# Altium PCB HeroRobot.PcbDoc
Units mil, origin at the board's own origin, x right, y up, seen from the top; angles counter-clockwise.
Board outline 3325 x 3450 mil, 2 copper layers (Top Layer, Bottom Layer); 127 components, 91 nets, 406 pads, 169 vias.
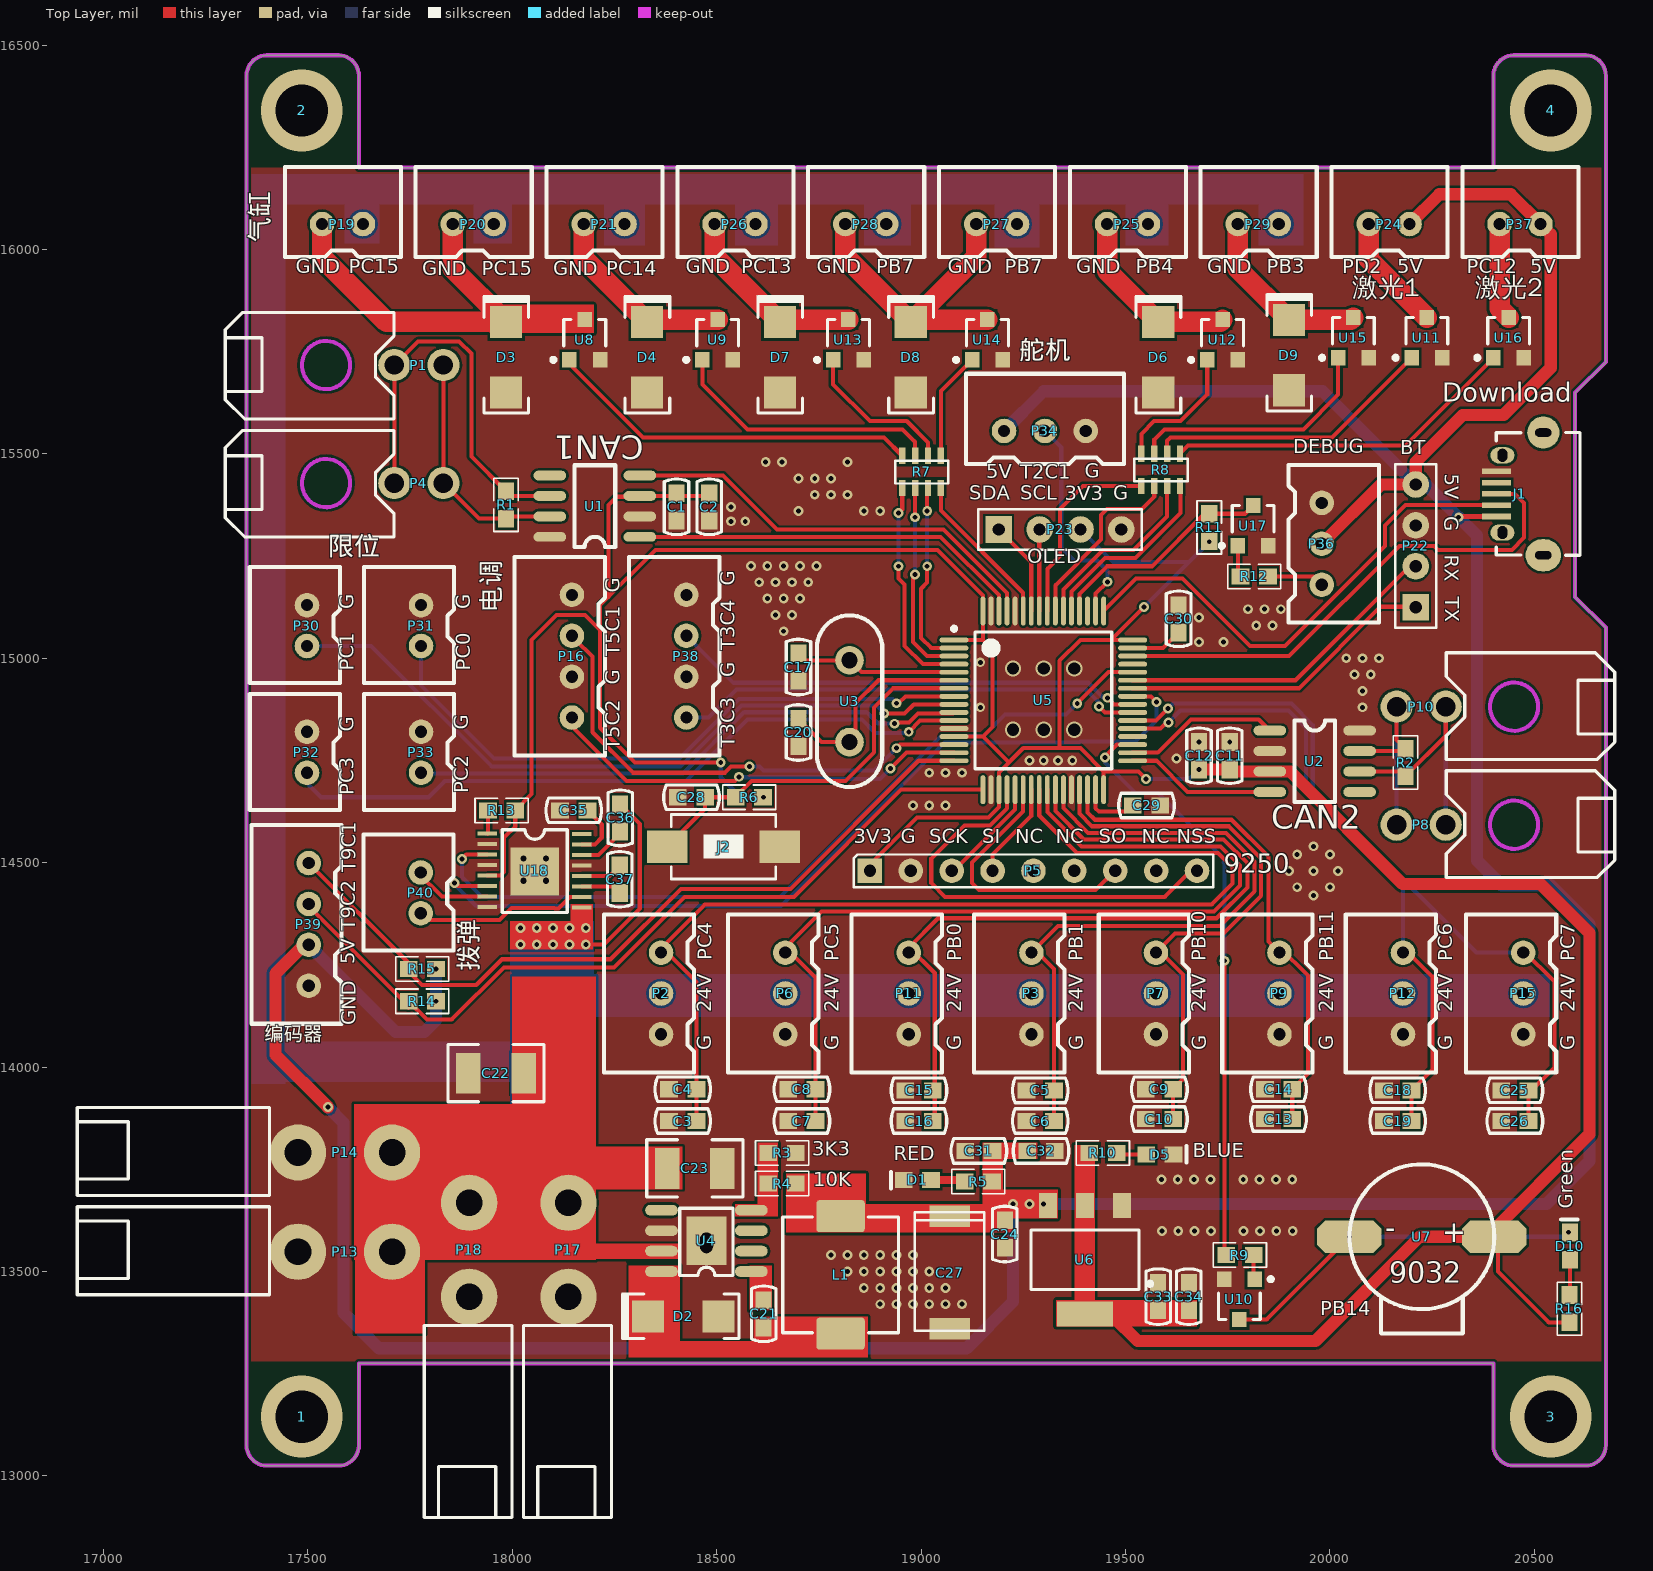
[diagram p0: Top Layer view]
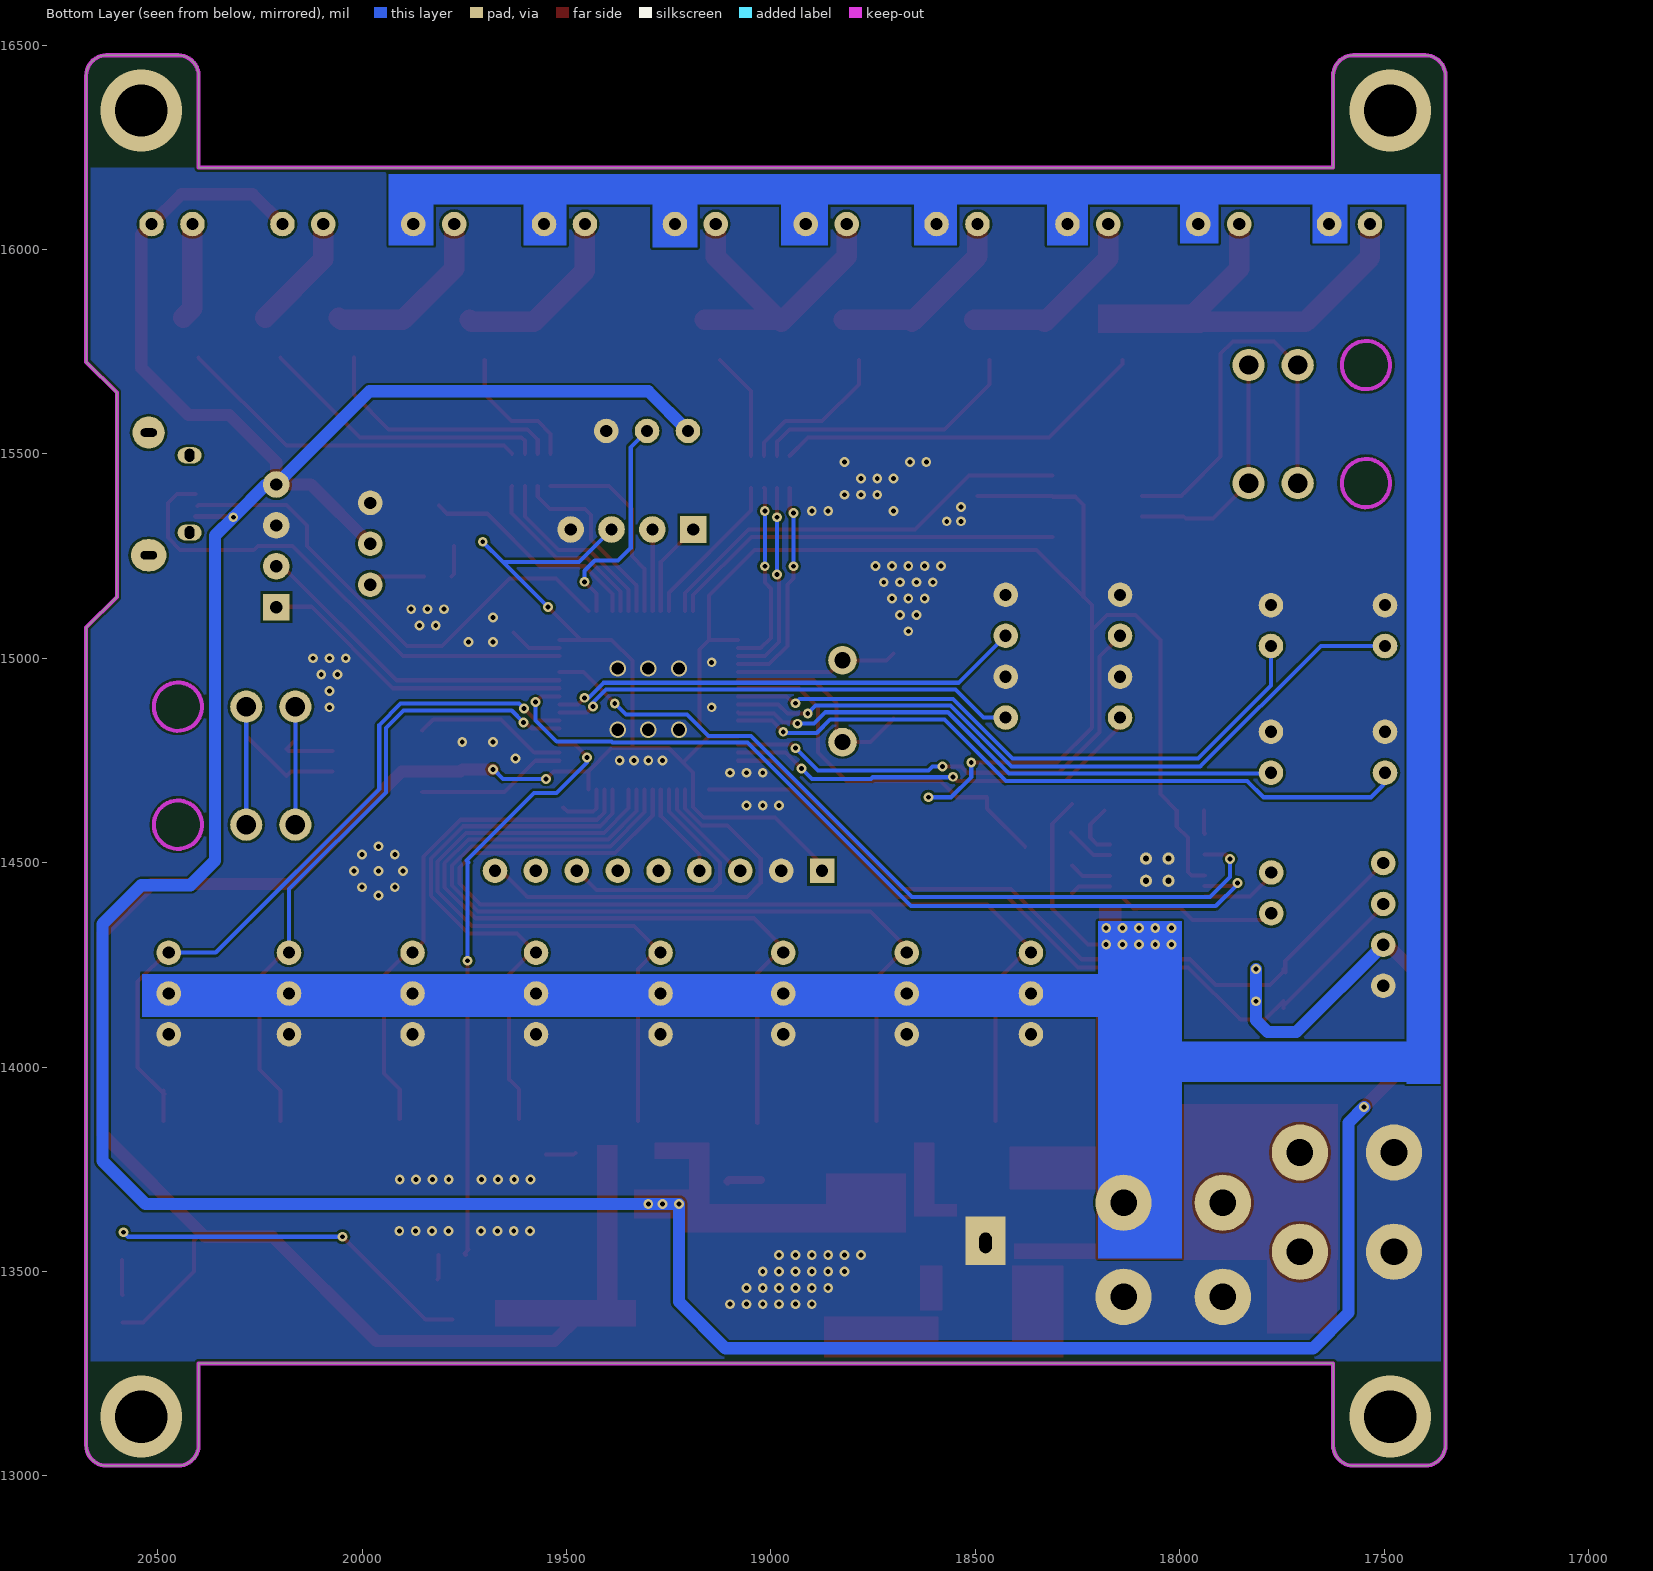
[diagram p1: Bottom Layer view, seen from below]

## Layer stack, top to bottom
Top Solder: solder mask 0.4, Solder Resist, Dk 3.5
Top Layer: signal copper 1.4
Dielectric 1: dielectric 12.6, FR-4, Dk 4.8
Bottom Layer: signal copper 1.4
Bottom Solder: solder mask 0.4, Solder Resist, Dk 3.5

## Board outline
17400,13025 17575,13025 ccw(c17575,13075) 17625,13075 17625,13275 20400,13275 20400,13075 ccw(c20450,13075) 20450,13025 20625,13025 ccw(c20625,13075) 20675,13075 20675,15075 20600,15150 20600,15650 20675,15725 20675,16425 ccw(c20625,16425) 20625,16475 20450,16475 ccw(c20450,16425) 20400,16425 20400,16200 17625,16200 17625,16425 ccw(c17575,16425) 17575,16475 17400,16475 ccw(c17400,16425) 17350,16425 17350,13075 ccw(c17400,13075)

## Design rules (kind name [scope] priority, off if disabled: settings)
Clearance [All] p1: gap=6
HoleSize [All] p1: absolutevalues=TRUE maxlimit=2333 minlimit=1 maxpercent=80.000 minpercent=20.000
HoleToHoleClearance [All] p1: gap=0 allowstackedmicrovias=TRUE
MinimumSolderMaskSliver [All] p1: minsoldermaskwidth=0
PolygonConnect [All] p1: connectstyle=Direct reliefconductorwidth=10 reliefentries=4 polygonreliefangle="90 Angle" airgapwidth=10
RoutingVias [All] p1: holewidth=28 width=50 viastyle="Through Hole" minholewidth=12 minwidth=24 maxholewidth=3333 maxwidth=2333
SilkToSilkClearance [All] p1: silktosilkclearance=0
SilkToSolderMaskClearance [IsPad] p1: minsilkscreentomaskgap=0 clearancetoexposedcopper=TRUE
SolderMaskExpansion [All] p1: expansion=4
Width [All] p1: maxlimit=2333 minlimit=10 preferedwidth=10
25 further rules are at their usual default settings.

## Components (designator, comment, footprint, x,y, rotation, side; value= is the part's Value field where it differs from the comment)
1 "Via_M3" Via_M3 17485,13145 r90 top
2 "Via_M3" Via_M3 17485,16340 r90 top
3 "Via_M3" Via_M3 20540,13145 r90 top
4 "Via_M3" Via_M3 20540,16340 r90 top
C1 "106" 0603C 18402,15372 r270 top
C2 "104" 0603C 18482,15372 r270 top
C3 "106" 0603C 18415.56,13868 r0 top
C4 "104" 0603C 18415.56,13945.85 r0 top
C5 "106" 0603C 19290.04,13943 r0 top
C6 "104" 0603C 19290.04,13868 r0 top
C7 "106" 0603C 18707.05,13868 r0 top
C8 "104" 0603C 18707.05,13945.85 r0 top
C9 "106" 0603C 19581.53,13945.85 r0 top
C10 "104" 0603C 19581.53,13873 r0 top
C11 "106" 0603C 19755,14760 r90 top
C12 "104" 0603C 19680,14760 r90 top
C13 "106" 0603C 19873.02,13873 r0 top
C14 "104" 0603C 19873.02,13945.85 r0 top
C15 "106" 0603C 18993.54,13943.02 r0 top
C16 "104" 0603C 18993.54,13868 r0 top
C17 "22p" 0603C 18700,14980 r270 top
C18 "106" 0603C 20164.51,13943.02 r0 top
C19 "104" 0603C 20164.51,13868 r0 top
C20 "22p" 0603C 18700,14820 r270 top
C21 "105" 0603C 18615,13395 r90 top
C22 "100uF" 1201C 17963,13985 r270 top
C23 "100uF" 1201C 18444,13752 r90 top
C24 "104" 0603C 19205,13590 r90 top
C25 "106" 0603C 20451,13943.02 r0 top
C26 "104" 0603C 20451,13868 r0 top
C27 "CAP_钽220" cap_钽E封装 19075,13495 r0 top
C28 "104" 0603C 18440,14660 r180 top
C29 "2.2u" 0603C 19550,14640 r0 top
C30 "2.2u" 0603C 19630,15095 r90 top
C31 "106" 0603C 19140,13795 r0 top
C32 "104" 0603C 19295,13795 r180 top
C33 "106" 0603C 19580,13440 r270 top
C34 "104" 0603C 19655,13440 r270 top
C35 "104" 0603C 18152,14628 r180 top
C36 "104" 0603C 18264,14608 r90 top
C37 "104" 0603C 18263,14461 r270 top
D1 "LED" LED_0603 18990,13725 r180 top
D2 "Diode_SS34" Diode_SS34 18420,13390 r180 top
D3 "Diode_SS34" Diode_SS34 17985,15735 r90 top
D4 "Diode_SS34" Diode_SS34 18330,15735 r90 top
D5 "LED" LED_0603 19585,13785 r0 top
D6 "Diode_SS34" Diode_SS34 19580,15735 r90 top
D7 "Diode_SS34" Diode_SS34 18655,15735 r90 top
D8 "Diode_SS34" Diode_SS34 18975,15735 r90 top
D9 "Diode_SS34" Diode_SS34 19900,15740 r90 top
D10 "LED" LED_0603 20588,13563 r90 top
J1 "USB_MICRO" USB_MICRO 20465,15402 r90 top
J2 "KEY" KEY 18520,14540 r90 top
L1 "15uH" Inductor7.2X7.2 18805,13485 r90 top
P1 "Header_CAN" Header2_3002 17560.17,15713.19 r270 top
P2 "Header3" Header3_white 18334,14180 r90 top
P3 "Header3" Header3_white 19240,14180 r90 top
P4 "Header_CAN" Header2_3002 17560.17,15424.49 r270 top
P5 "Header9" Header9 19275,14480 r90 top
P6 "Header3" Header3_white 18638,14180 r90 top
P7 "Header3" Header3_white 19544.57,14180 r90 top
P8 "Header_CAN" Header2_3002 20434.83,14596.81 r90 top
P9 "Header3" Header3_white 19846.71,14180 r90 top
P10 "Header_CAN" Header2_3002 20434.83,14885.51 r90 top
P11 "Header3" Header3_white 18940,14180 r90 top
P12 "Header3" Header3_white 20148.86,14180 r90 top
P13 "Header2X1" Header_POWER 17341,13543.19 r270 top
P14 "Header2X1" Header_POWER 17341,13786.06 r270 top
P15 "Header3" Header3_white 20443,14180 r90 top
P16 "Header4" Header4_white 18115,15005 r90 top
P17 "Header2X1" Header_POWER 18142.56,13303 r0 top
P18 "Header2X1" Header_POWER 17899.69,13303 r0 top
P19 "Header" Header2_white 17589.76,16089.13 r0 top
P20 "Header" Header2_white 17909.78,16089.13 r0 top
P21 "Header" Header2_white 18229.81,16089.13 r0 top
P22 "Header4" Header4 20210,15325 r180 top
P23 "Header4" Header4 19390,15315 r90 top
P24 "Header" Header2_white 20149.97,16089.13 r0 top
P25 "Header" Header2_white 19509.92,16089.13 r0 top
P26 "Header" Header2_white 18549.84,16089.13 r0 top
P27 "Header" Header2_white 19189.89,16089.13 r0 top
P28 "Header" Header2_white 18869.86,16089.13 r0 top
P29 "Header" Header2_white 19829.95,16089.13 r0 top
P30 "Header" Header2_white 17471,15085 r90 top
P31 "Header" Header2_white 17750,15085 r90 top
P32 "Header" Header2_white 17471,14775 r90 top
P33 "Header" Header2_white 17750,14775 r90 top
P34 "Header3" Header3_white 19303,15586 r0 top
P36 "Header3" Header3_white 20010,15280 r270 top
P37 "Header" Header2_white 20470,16089.13 r0 top
P38 "Header4" Header4_white 18395,15005 r90 top
P39 "Header4" Header4_white 17471,14349 r90 top
P40 "Header" Header2_white 17749,14431 r90 top
R1 "1K" 0603R 17985,15375 r90 top
R2 "1K" 0603R 20185,14745 r270 top
R3 "3k3" 0603R 18660,13790 r0 top
R4 "10k" 0603R 18660,13715 r180 top
R5 "1K" 0603R 19140,13720 r0 top
R6 "1K" 0603R 18580,14660 r0 top
R7 "1K" 8P4R_0603 19000,15455 r0 top
R8 "1K" 8P4R_0603 19585,15460 r0 top
R9 "1K" 0603R 19780,13540 r180 top
R10 "1K" 0603R 19445,13790 r180 top
R11 "1K" 0603R 19705,15320 r270 top
R12 "1K" 0603R 19815,15200 r0 top
R13 "10k" 0603R 17974,14628 r0 top
R14 "10K" 0603R 17780,14161 r0 top
R15 "10K" 0603R 17780,14240 r0 top
R16 "1K" 0603R 20586,13409 r90 top
U1 "VD230" SO_8 18205,15380 r180 top
U2 "VD230" SO_8 19960,14740 r0 top
U3 "XTAL" XATL_8M 18810,14905 r270 top
U4 "TPS5430/5450" TPS5430 18465,13565 r180 top
U5 "STM32F405RGT6(F103RCT6)" "LQFP_64Pins - duplicate" 19300,14900 r0 top
U6 "1117" SOT-223 19400,13520 r180 top
U7 "Bell" BELL_无源 20220,13590 r0 top
U8 "BJT-2N5551" SOT_23 18175,15755 r0 top
U9 "BJT-2N5551" SOT_23 18500,15755 r0 top
U10 "BJT-2N5551" SOT_23 19780.98,13456.13 r180 top
U11 "BJT-2N5551" SOT_23 20235,15760 r0 top
U12 "BJT-2N5551" SOT_23 19735,15755 r0 top
U13 "BJT-2N5551" SOT_23 18820,15755 r0 top
U14 "BJT-2N5551" SOT_23 19160,15755 r0 top
U15 "BJT-2N5551" SOT_23 20055,15760 r0 top
U16 "BJT-2N5551" SOT_23 20435,15760 r0 top
U17 "BJT-2N5551" SOT_23 19810,15300 r0 top
U18 "DRV8800" HTSSOP 18054,14482 r0 top

## Footprints (in the part's own frame and the unit in brackets; to place one, negate y for a bottom-side part, rotate by r counter-clockwise, add the part's x,y. Pads: shape width x height; smd on the part's side, far side on the other; paste and mask are expansions set on the pad)
8P4R_0603 [mm]
  rect 0.4x1 smd: 1(-1.169,-0.976) 2(-0.369,-0.976) 3(0.431,-0.976) 4(1.231,-0.976) 5(1.231,1.024) 6(0.431,1.024) 7(-0.369,1.024) 8(-1.169,1.024)
  silkscreen extent -1.6,-0.7 1.7,0.7, body extent -1.6,-1 1.7,1, height 0.7
0603C [mm]
  rect 1.1x1 smd: 1(-0.811,0) 2(0.889,0)
  silkscreen extent -1.69,-0.76 1.77,0.76, body extent -1.29,-0.47 1.31,0.53, height 0.89
0603R [mm]
  rect 1.1x1 smd: 1(-0.85,0) 2(0.85,0)
  silkscreen extent -1.65,-0.76 1.65,0.76, body extent -0.8,-0.4 0.8,0.4, height 0.45
1201C [mil]
  rect 100x60 smd: 1(0,64.72) 2(0,-70.28)
  silkscreen extent -70,-120 70,115, body extent -65,-115 65,110, height 100
BELL_无源 [mm]
  oct 4x2 smd: 1(4.627,-0.127) 2(-4.373,-0.127)
  silkscreen extent -4.37,-6.13 4.63,4.37
cap_钽E封装 [mil]
  rect 98.43x53.54 smd: 1(-5,-135) 2(-5,140)
  silkscreen extent -90,-140 80,150, body extent -90,-165 80,170, height 161
Diode_SS34 [mm]
  rect 2x2 smd: 1(-2.15,0) 2(2.225,0)
  silkscreen extent -3.43,-1.4 3.81,1.38, body extent -2.4,-1.4 2.45,1.38, height 1.4
Header2_3002 [mm]
  round 2 hole 1.2: 1(-0.1,6.895) 2(-0.1,3.845)
  Keep-Out Layer circle w0.254: c-0.1,-0.398 r1.5
  silkscreen extent -3.38,-6.66 3.25,3.82, body extent -3.3,-6.73 3.18,7.28, height 7.11
Header2_white [mil]
  round 60 hole 30: 1(-55,-27) 2(45,-27)
  silkscreen extent -146,-108 138,113
Header3_white [mil]
  round 60 hole 30: 1(-100,-30) 2(0,-30) 3(100,-30)
  silkscreen extent -193,-111 193,110
Header4 [mil]
  rect 65x65 hole 30: 1(0,200)
  round 65 hole 30: 2(0,100) 3(0,0) 4(0,-100)
  silkscreen extent -50,-150 50,250, body extent -50,-150 50,250, height 250
Header4_white [mil]
  round 60 hole 30: 1(-150,-31) 2(-50,-31) 3(50,-31) 4(150,-31)
  silkscreen extent -243,-112 243,109
Header9 [mil]
  rect 60x60 hole 30: 1(0,400)
  round 60 hole 30: 2(0,300) 3(0,200) 4(0,100) 5(0,0) 6(0,-100) 7(0,-200) 8(0,-300) 9(0,-400)
  silkscreen extent -40,-440 40,440
Header_POWER [mm]
  round 3.5 hole 1.65: 1(-0.127,9.271) 2(-0.127,3.429)
  silkscreen extent -2.92,-10.29 2.54,1.65, body extent -2.92,-10.54 2.54,10.03, height 11.43
HTSSOP [mm]
  round 0.762 hole 0.381: 0(-0.672,0.706) 0(-0.672,-0.669) 0(0.728,-0.669) 0(0.728,0.706)
  rect 3x3 smd: 0(0.028,-0.094)
  rect 1.2x0.25 smd: 1(-2.922,2.256) 2(-2.922,1.606) 3(-2.922,0.956) 4(-2.922,0.306) 5(-2.922,-0.344) 6(-2.922,-0.994) 7(-2.922,-1.644) 8(-2.922,-2.294) 9(2.953,-2.319) 10(2.953,-1.669) 11(2.953,-1.019) 12(2.953,-0.369) 13(2.953,0.281) 14(2.953,0.931) 15(2.953,1.581) 16(2.953,2.231)
  silkscreen extent -2,-2.64 2.05,2.51, body extent -2.01,-2.67 2.06,2.51, height 0.76
Inductor7.2X7.2 [mm]
  rrect20% 2x3 smd: 1(-3.479,0.044) 2(3.821,0.044)
  silkscreen extent -3.43,-3.56 3.77,3.64, body extent -3.4,-3.56 3.76,3.63, height 4
KEY [mm]
  rect 2x2.5 smd: 1(-0.025,3.581) 2(-0.025,-3.419)
  silkscreen extent -2.03,-3.17 1.97,3.33, body extent -2.06,-3.15 2.01,3.33, height 1.2
LED_0603 [mm]
  rect 1.1x1 smd: 1(-0.875,0.025) 2(0.825,0.025)
  silkscreen extent 1.63,-0.46 1.63,0.56, body extent -1.52,-0.51 1.4,0.64, height 0.66
"LQFP_64Pins - duplicate" [mm]
  oval 1.8x0.3 smd: 1(-5.575,3.674) 2(-5.575,3.174) 3(-5.575,2.674) 4(-5.575,2.174) 5(-5.575,1.674) 6(-5.575,1.174) 7(-5.575,0.674) 8(-5.575,0.174) 9(-5.575,-0.326) 10(-5.575,-0.826) 11(-5.575,-1.326) 12(-5.575,-1.826) 13(-5.575,-2.326) 14(-5.575,-2.826) 15(-5.575,-3.326) 16(-5.575,-3.826) 33(5.525,-3.826) 34(5.525,-3.326) 35(5.525,-2.826) 36(5.525,-2.326) 37(5.525,-1.826) 38(5.525,-1.326) 39(5.525,-0.826) 40(5.525,-0.326) 41(5.525,0.174) 42(5.525,0.674) 43(5.525,1.174) 44(5.525,1.674) 45(5.525,2.174) 46(5.525,2.674) 47(5.525,3.174) 48(5.525,3.674)
  oval 0.3x1.8 smd: 17(-3.775,-5.626) 18(-3.275,-5.626) 19(-2.775,-5.626) 20(-2.275,-5.626) 21(-1.775,-5.626) 22(-1.275,-5.626) 23(-0.775,-5.626) 24(-0.275,-5.626) 25(0.225,-5.626) 26(0.725,-5.626) 27(1.225,-5.626) 28(1.725,-5.626) 29(2.225,-5.626) 30(2.725,-5.626) 31(3.225,-5.626) 32(3.725,-5.626) 49(3.725,5.474) 50(3.225,5.474) 51(2.725,5.474) 52(2.225,5.474) 53(1.725,5.474) 54(1.225,5.474) 55(0.725,5.474) 56(0.225,5.474) 57(-0.275,5.474) 58(-0.775,5.474) 59(-1.275,5.474) 60(-1.775,5.474) 61(-2.275,5.474) 62(-2.775,5.474) 63(-3.275,5.474) 64(-3.775,5.474)
  silkscreen extent -5.7,-4.33 4.22,4.5, body extent -5.03,-5.08 4.97,4.92, height 1.6
SO_8 [mil]
  oval 80x24 smd: 1(-107,83) 2(-107,33) 3(-107,-17) 4(-107,-67) 5(113,-67) 6(113,-17) 7(113,33) 8(113,83)
  silkscreen extent -47,-92 53,108, body extent -91,-97 102,113, height 30
SOT-223 [mm]
  rect 1.1x1.55 smd: 1(-2.325,-3.604) 2(-0.025,-3.604) 3(2.275,-3.604)
  rect 3.45x1.55 smd: 2(-0.025,3.146)
  silkscreen extent -4.19,-2.08 3.32,1.62, body extent -3.33,-4.17 3.28,3.2, height 0.8
SOT_23 [mm]
  rect 0.9x0.95 smd: 1(-0.889,-0.635) 2(1.011,-0.635) 3(0.061,1.865)
  silkscreen extent -2.01,-0.76 1.36,1.87, body extent -1.27,-0.25 1.4,1.52, height 0.89
TPS5430 [mil]
  oval 80x26 smd: 1(-120,65) 2(-120,15) 3(-120,-35) 4(-120,-85) 5(100,-85) 6(100,-35) 7(100,15) 8(100,65)
  oval 50x70 hole 30 slot 50 at 90 deg: 6(-10,-5)
  rect 98x118 smd: 6(-10,-10)
  rect 98x118 smd far side: 6(-10,-10)
  silkscreen extent -75,-90 55,75, body extent -80,-100 60,80, height 30
USB_MICRO [mm]
  rect 0.35x1.8 smd: 1(-1.4,1.45) 2(-0.7,1.45) 3(0,1.45) 4(0.7,1.45) 5(1.4,1.45)
  oval 2x2.2 hole 0.508 slot 1.016 at 90 deg unplated: 6(-3.81,-1.45)
  oval 1x1.5 hole 0.6 slot 0.8 at 0 deg: 6(-2.4,1.09) 6(2.4,1.09)
  round 2 hole 0.508 slot 1.016 at 90 deg unplated: 6(3.81,-1.45)
  silkscreen extent -3.81,-3.74 3.81,1.47
Via_M3 [mil]
XATL_8M [mil]
  round 70 hole 40: 1(-90,15) 2(110,15)
  silkscreen extent -200,-65 220,95, body extent -200,-65 220,95, height 110

## Part data
C1 C3 C5 C7 C9 C11 C13 C15 C18 C21 C25 C31 C33: library part C_106, "0603/0805"
C2 C4 C6 C8 C10 C12 C14 C16 C17 C19 C20 C24 C26 C28 C29 C30 C32 C34 C35 C36 C37: library part C_104, "0603/0805"
C22 C23: library part CAP100uF
C27: "CAP"
D2 D3 D4 D6 D7 D8 D9: "肖特基二极管"
L1: library part Inductor, "屏蔽电感"
P13 P14 P17 P18: "power"
P19 P20 P21 P24 P25 P26 P27 P28 P29 P30 P31 P32 P33 P37 P40: library part Header2
R1 R2 R3 R4 R5 R6 R9 R10 R11 R12 R13 R14 R15 R16: library part R, "0603/0805"
R7 R8: library part R_8P4R
U1 U2: "SO-8"
U4: "降压"
U5: "64PINS"
U6: library part AMS1117-3.3
U18: "HTSSOP"

## Via types
v1: diameter 24, hole 12, Top Layer to Bottom Layer, tented both sides, 159 vias
v2: diameter 40, hole 30, Top Layer to Bottom Layer, tented both sides, 6 vias
v3: diameter 200, hole 128, Top Layer to Bottom Layer, 4 vias

## Nets (pads, with @x,y where several pads share a name; then routed paths per layer and width w, separated by ;. In a path a pad name is that pad's centre, name@x,y a point inside that pad or via, vN(x,y) a via of type N, cw(c..) or ccw(c..) an arc to the next point about the centre after c; other vN are vias at no path point)
1: D3.2 P19.1 P20.1 U8.3 | length 890.9
  Top Layer w50: P19.1 17534.76,15980.24 17692.4,15822.6 D3.2 17854.78,15952.82 P20.1
2: D4.2 P21.1 U9.3 | length 478.6
  Top Layer w50: P21.1 18174.81,15977.79 D4.2 18335.83,15828.43 U9.3
3: D7.2 P26.1 U13.3 | length 475.7
  Top Layer w50: P26.1 18494.84,15982.76 D7.2 18660.83,15828.43 U13.3
3V3: C1.1 C2.1 C11.1 C12.1 C33.2 C34.2 P5.1 P23.3 R6.2 R10.2 R11.2 R13.2 R16.1 U1.3 U2.3 U5.1 U5.13 U5.19 U5.32 U5.48 U5.64 U6.2 U7.1 U18.5 | length 9411.6
  Top Layer w10: U18.5 17971.45,14468.45 17980,14477 17980,14561 18007.46,14588.46 R13.2 18047,14667.54 18047,15045 18108,15106 18178,15106 18215,15069 ; 18235,15150 18235,15375 18255,15395 18310,15395 U1.3 18414.93,15397 18415,15396.93 C2.1@18495,15396.93 ; v1(18510,14745) 18300,14745 18215,14830 18215,15069 ; P5.1@18875,14495 18990,14610 19164.75,14610 19190.73,14635.99 U5.19 19190.73,14720.73 19250,14780 19335,14780 ; U5.13 19151.14,14808.42 19175,14832.28 19175,15021 19151.36,15044.64 ; U5.1 19151.36,15044.64 ; 19151.36,14808.64 19215,14745 ; U6.2@19401,13396.13 19463.87,13396.13 19471,13389 ; U6.2@19401,13661.87 19401,13779.46 R10.2 ; U5.32 19446.64,14723.36 ; U5.48 19464.64,15044.64 ; v1(19545,15125) 19464.64,15044.64 ; v1(19550,14705) 19531.64,14723.36 19446.64,14723.36 ; U7.1 20411,13576.17 20411,13500 20535.46,13375.54 R16.1 ; 18215,15069 18215,15130 18350,15265 19040,15265 19151.36,15153.64 U5.64 19151.36,15044.64 ; 19335,14780 19390,14780 19446.64,14723.36 ; 19335,14780 19339,14784 19339,14994 19389.64,15044.64 19464.64,15044.64
  Top Layer w30: 19471,13389 19530,13330 19965,13330 20220,13585 20384,13585 20635,13836 20635,14328 20515,14448 20178,14448 19903,14723 U2.3 19760.07,14723 C11.1 v1(19680,14728.07)
  Bottom Layer w10: v1(18510,14745) 18510,14710 18560,14660 v1(18615,14660) ; P23.3 19470,15235 19655,15235 ; v1(19545,15125) 19655,15235 ; v1(19550,14705) 19655,14705 19678.07,14728.07 v1(19680,14728.07) ; v1(19705,15285) 19655,15235
4: D8.2 P27.1 P28.1 U14.3 | length 793.2
  Top Layer w50: P28.1 18814.86,15982.73 D8.2 D8.2@18980.83,15828.43 ; P27.1 19134.89,15982.49 D8.2@18980.83,15828.43 ; U14.3 D8.2@18980.83,15828.43
5: D6.2 P25.1 U12.3 | length 451.2
  Top Layer w50: P25.1 19454.92,15947.68 D6.2 19731.57,15822.6 U12.3
5V: C24.2 C27.2 C31.2 C32.2 J1.1 L1.2 P22.4 P24.2 P34.1 P36.2 P37.2 P39.2 R4.1 R5.2 R14.2 R15.2 U6.3 | length 9639.6
  Top Layer w12: v1(20315,15345) 20316.88,15346.88 J1.1
  Top Layer w30: P39.2 17502,14310 17421,14229 17421,14030 v1(17549,13902) ; P36.2 20125,15425 P22.4 20210,15480 20325,15595 20425,15595 20540,15710 20540,16037.13 P37.2 20442.13,16135 20267.85,16135 P24.2
  Bottom Layer w30: P39.2 17715,14086 17785,14086 17813.46,14114.46 v1(17813.46,14161) v1(17813.46,14240) ; v1(17549,13902) 17587,13864 17587,13399 17674,13312 19111,13312 19225,13426 v1(19225,13665) v1(19265,13665) v1(19300,13665) 20530,13665 20635,13770 20635,14350 20540,14445 20420,14445 20360,14505 20360,15300 v1(20315,15345) 20235,15425 P22.4 19982,15653 19300,15653 P34.1
6: D9.2 P29.1 U15.3 | length 446.1
  Top Layer w50: P29.1 19774.95,15952.65 D9.2 20051.57,15827.6 U15.3
24V: C22.1 C23.1 C36.2 P2.2 P3.2 P6.2 P7.2 P9.2 P11.2 P12.2 P13.1 P14.1 P15.2 P17.1 P18.1 P19.2 P20.2 P21.2 P25.2 P26.2 P27.2 P28.2 P29.2 U4.7 U18.9 | length 443.3
  Top Layer w10: v1(18180,14300) 18224,14300 18312,14388 18312,14595 C36.2
  other v1: 18020,14300 18060,14300 18100,14300 18140,14300 18020,14340 18060,14340 18100,14340 18140,14340 18180,14340
BEEP: R9.2 U5.35 | length 1463.1
  Top Layer w10: v1(19450,14757.5) 19450,14760 19478.73,14788.73 U5.35 ; v1(19742,14260) 19742,13555.46 19740,13553.46 19750,13543.46 R9.2
  Bottom Layer w10: v1(19450,14757.5) 19450,14745 19525,14670 19580,14670 19745,14505 19740,14500 19742,14498 v1(19742,14260)
CAN1_RX: U1.4 U5.61 | length 1061.5
  Top Layer w10: U1.4 18515.68,15447 18648,15314.68 19055.32,15314.68 19210.42,15159.58 U5.61
CAN1_TX: U1.1 U5.62 | length 976.6
  Top Layer w10: U1.1 18522,15297 19048,15297 19190.73,15154.27 U5.62
CAN1H: P1.1 P4.1 R1.1 U1.7 | length 587.3
  Top Layer w10: P1.1 P4.1 17918.52,15341.54 R1.1 17990.46,15347 U1.7
CAN1L: P1.2 P4.2 R1.2 U1.6 | length 997
  Top Layer w10: P4.2 P1.2 17769.43,15775 17870,15775 17900,15745 17900,15493.46 R1.2 17996.46,15397 U1.6
CAN2_RX: U2.4 U5.33 | length 367.1
  Top Layer w10: U5.33 19575.64,14749.36 19652,14673 U2.4
CAN2_TX: U2.1 U5.34 | length 380.2
  Top Layer w10: U5.34 19579.05,14769.05 19660,14850 19826,14850 U2.1
CAN2H: P8.1 P10.1 R2.1 U2.7 | length 515
  Top Layer w10: U2.7 20179.54,14773 R2.1 20163.37,14800.09 P10.1
  Bottom Layer w10: P8.1 P10.1
CAN2L: P8.2 P10.2 R2.2 U2.6 | length 616.3
  Top Layer w10: U2.6 20173.54,14723 R2.2 20283.45,14809.98 P10.2
  Bottom Layer w10: P8.2 P10.2
CLK: J1.2 U5.49 | length 1230.8
  Top Layer w10: U5.49 19526.13,15195 19640,15195 19805,15030 19890,15030 20135,15275 20135,15325 20185,15375 20400.35,15375 J1.2@20402.91,15372.44
DEBUS_RX: R11.1 U5.52 U17.3 | length 556.3
  Top Layer w10: U5.52 19387.58,15157.58 19455,15225 19565,15225 19693.46,15353.46 R11.1 19792.44,15353.46 U17.3
DIO: J1.3 U5.46 | length 1247
  Top Layer w10: U5.46 19900.27,15005.27 20170,15275 20255,15275 20265,15265 20445,15265 20475,15295 20475,15380 20453,15402 J1.3
GND: C1.2 C2.2 C3.1 C4.1 C5.1 C6.1 C7.1 C8.1 C9.1 C10.1 C11.2 C12.2 C13.1 C14.1 C15.1 C16.1 C17.2 C18.1 C19.1 C20.2 C22.2 C23.2 C24.1 C25.1 C26.1 C27.1 C28.2 C29.2 C30.2 C31.1 C32.1 C33.1 C34.1 C35.2 D1.2 D2.1 D3.1 D4.1 D5.2 D6.1 D7.1 D8.1 D9.1 J1.5 J2.2 P2.1 P3.1 P5.2 P6.1 P7.1 P9.1 P11.1 P12.1 P13.2 P14.2 P15.1 P16.2 P16.4 P17.2 P18.2 P22.3 P23.4 P30.2 P31.2 P32.2 P33.2 P34.3 P36.1 P38.2 P38.4 P39.1 R3.2 U1.2 U1.8 U2.2 U2.8 U4.6 U5.12 U5.18 U5.28 U5.60 U5.63 U6.1 U8.2 U9.2 U10.2 U11.2 U12.2 U13.2 U14.2 U15.2 U16.2 U17.2 U18.0 U18.2 U18.4 U18.8 U18.13
  other v1: 18900,13420 18940,13420 18980,13420 19020,13420 19060,13420 19100,13420 18860,13460 18900,13460 18940,13460 18980,13460 19020,13460 19060,13460 18820,13500 18860,13500 18900,13500 18940,13500 18980,13500 19020,13500 18780,13540 18820,13540 18860,13540 18900,13540 18940,13540 18980,13540 19589,13599 19629,13599 19669,13599 19709,13599 19789,13599 19829,13599 19869,13599 19909,13599 19588,13725 19628,13725 19668,13725 19708,13725 19788,13725 19828,13725 19868,13725 19908,13725 19960,14420 19920,14440 20000,14440 19900,14480 19960,14480 20020,14480 19920,14520 20000,14520 19960,14540 18980,14640 19020,14640 19060,14640 19020,14720 19060,14720 19100,14720 19265,14750 19300,14750 19335,14750 19370,14750 19625,14755 19680,14795 19755,14795 19145,14880 20080,14880 20080,14920 20060,14960 20100,14960 19145,14990 20040,15000 20080,15000 20120,15000 19680,15040 19740,15040 18664,15066 19820,15080 19860,15080 19680,15100 18644,15106 18684,15106 19800,15120 19840,15120 19880,15120 18624,15146 18664,15146 18704,15146 18604,15186 18644,15186 18684,15186 18724,15186 18584,15226 18624,15226 18664,15226 18704,15226 18744,15226 18535,15335 18570,15335 18700,15360 18860,15360 18900,15360 18535,15370 18740,15400 18780,15400 18820,15400 18700,15440 18740,15440 18780,15440 18620,15480 18660,15480 18820,15480
  other v2: 19225,14825 19300,14825 19375,14825 19225,14975 19300,14975 19375,14975
I2C1_SCL: P23.2 U5.57 | length 199.8
  Top Layer w10: U5.57 19289.16,15314.16 P23.2
I2C1_SDA: P23.1 U5.58 | length 232.4
  Top Layer w10: P23.1 19269.47,15235.53 U5.58
NetC17_1: C17.1 U3.1 U5.5 | length 399.6
  Top Layer w10: C17.1 18716.93,14995 U3.1 18854.1,14965.9 U5.5
NetC20_1: C20.1 U3.2 U5.6 | length 513.6
  Top Layer w10: C20.1 18756.93,14795 U3.2 18840,14810 18840,14890 18896.21,14946.21 U5.6
NetC21_1: C21.1 D2.2 L1.1 U4.8
NetC21_2: C21.2 U4.1
NetC28_1: C28.1 J2.1 R6.1 U5.7 | length 942.9
  Top Layer w10: J2.1 18471.93,14631.93 C28.1 18545,14660 18585,14700 18815,14700 18885,14770 18885,14880 18931.53,14926.53 U5.7
NetC29_1: C29.1 U5.31 | length 134
  Top Layer w10: U5.31 19426.95,14633.05 19435,14625 19498.07,14625 C29.1@19508.07,14635
NetC30_1: C30.1 U5.47 | length 128.3
  Top Layer w10: U5.47 19591.88,15024.95 C30.1
NetC35_1: C35.1 U18.15 | length 137.2
  Top Layer w10: U18.15 18202.24,14544.24 18219,14561 18219,14592.93 C35.1
NetC36_1: C36.1 U18.14 | length 118.7
  Top Layer w10: U18.14 18210.65,14518.65 C36.1@18266.04,14574.04
NetC37_1: C37.1 U18.12 | length 103.3
  Top Layer w10: U18.12 18237.54,14467.46 C37.1
NetC37_2: C37.2 U18.11 | length 99.3
  Top Layer w10: U18.11 18247.13,14441.87 C37.2
NetD1_1: D1.1 R5.1 | length 83.7
  Top Layer w20: D1.1 19102.54,13724 R5.1
NetD5_1: D5.1 R10.1 | length 73.7
  Top Layer w10: R10.1 19482.46,13786 D5.1
NetD10_1: D10.1 R16.2 | length 86.5
  Top Layer w10: R16.2 20587,13443.46 D10.1
NetD10_2: D10.2 U7.2 U10.3 | length 893.8
  Top Layer w10: U10.3 19845.54,13382.7 v1(20047.83,13585)
  Bottom Layer w10: v1(20047.83,13585) 20573,13585 v1(20584,13596)
NetP24_1: P24.1 U11.3 | length 287.7
  Top Layer w50: P24.1 20094.97,15975.85 U11.3
NetP36_3: P36.3 R12.2 | length 139.8
  Top Layer w10: R12.2 19960,15200 P36.3
NetP37_1: P37.1 U16.3 | length 238
  Top Layer w50: P37.1 20415,15855.83 U16.3
NetP40_1: P40.1 U18.10 | length 429.9
  Top Layer w10: P40.1@17774,14383 17797,14360 17969,14360 17998,14389 18103,14389 18104,14388 18113,14388 18141.28,14416.28 U18.10
NetP40_2: P40.2 U18.7 | length 192.9
  Top Layer w10: P40.2@17770,14475 17827.73,14417.27 U18.7
NetR3_1: R3.1 R4.2 U4.4
NetR9_1: R9.1 U10.1 | length 59.9
  Top Layer w10: R9.1 19813.46,13483.64 U10.1
NetR12_1: R12.1 U17.1 | length 77.7
  Top Layer w10: U17.1 19775,15206.54 R12.1
NetR13_1: R13.1 U18.1 | length 57.8
  Top Layer w10: U18.1 17940.54,14572.39 R13.1
PHASE: U5.44 U18.3 | length 1998.9
  Top Layer w10: v1(17877,14509) 17887.63,14519.63 U18.3 ; v1(19382,14889) 19458.9,14965.9 U5.44
  Bottom Layer w10: v1(17877,14509) 17877,14465 17926,14416 18655,14416 19049,14810 19153,14810 19205,14862 19355,14862 v1(19382,14889)
SPI1_MISO: P5.7 U5.22 | length 671.1
  Top Layer w10: U5.22 19249.79,14624.79 19125,14500 19125,14450 19142,14433 19427,14433 19475,14481 P5.7@19475,14495
SPI1_MOSI: P5.4 U5.23 | length 237.6
  Top Layer w10: P5.4 19175,14520 19269.47,14614.47 U5.23
SPI1_NSS: P5.9 U5.20 | length 1038.6
  Top Layer w10: U5.20 19210.42,14633.04 19168.37,14591 19106,14591 19025,14510 19025,14450 19059,14416 19596,14416 P5.9@19675,14495
SPI1_SCK: P5.3 U5.21 | length 259.5
  Top Layer w10: P5.3@19075,14495 19095,14495 19230.1,14630.1 U5.21
T2C1: P34.2 U5.50 | length 549.3
  Top Layer w10: U5.50 19426.95,15157.95 v1(19456,15187)
  Bottom Layer w10: P34.2 19343,15516 19343,15270 19374,15239 19431,15239 19456,15214 v1(19456,15187)
T3C3: P38.1 U5.39 | length 1149.3
  Top Layer w10: v1(19435.05,14882.05) 19449.63,14867.47 U5.39
  Bottom Layer w10: P38.1 18480,14855 18549,14924 19403,14924 19435.05,14891.95 v1(19435.05,14882.05)
T3C4: P38.3 U5.40 | length 1161
  Top Layer w10: v1(19456.26,14903.26) 19472.37,14887.16 U5.40
  Bottom Layer w10: P38.3 18541,14940 19409.63,14940 19446.36,14903.26 v1(19456.26,14903.26)
T5C1: P16.3 U5.14 | length 1219.2
  Top Layer w10: P16.3@18141,15045 18155,15045 18196,15004 18196,14819 18295,14720 18520,14720 18535,14735 v1(18580,14735) ; v1(18940,14780) 18948.73,14788.73 U5.14
  Bottom Layer w10: v1(18580,14735) 18605,14735 18615,14725 18885,14725 v1(18940,14780)
T5C2: P16.1 U5.15 | length 1034.1
  Top Layer w10: P16.1@18138,14842 18280,14700 18545,14700 v1(18555,14710) ; v1(18925,14730) 18964.05,14769.05 U5.15
  Bottom Layer w10: v1(18555,14710) 18556,14709 18751,14709 18755,14705 18900,14705 v1(18925,14730)
T9C1: P39.4 R15.1 U5.16 | length 1948.5
  Top Layer w10: P39.4 17742,14259 R15.1@17742,14231 ; R15.1 17746.54,14233.46 17779,14201 17912,14201 17974.8,14263.8 18240.8,14263.8 18413,14436 18681,14436 18994.36,14749.36 U5.16
T9C2: P39.3 R14.1 U5.17 | length 2011.7
  Top Layer w10: P39.3 17502,14393.64 17746.54,14149.1 R14.1@17746.54,14145 ; R14.1 17791.54,14116 17852,14116 17980,14244 18249,14244 18421.2,14416.2 18689.2,14416.2 18951.5,14678.5 U5.17
TIM_拨弹电机: U5.41 U18.6 | length 2122.1
  Top Layer w10: v1(17859,14450) 17866.14,14442.86 U18.6 ; U5.41 19562.16,14906.84 v1(19576,14893)
  Bottom Layer w10: v1(17859,14450) 17859,14447 17912,14394 18657,14394 19057,14794 19387.84,14794 19389.84,14796 19524,14796 19576,14848 v1(19576,14893)
U1_RX: P22.2 U5.43 | length 808
  Top Layer w10: U5.43 19916.21,14946.21 20195,15225 P22.2
U1_TX: P22.1 U5.42 | length 775.6
  Top Layer w10: U5.42 19924.37,14926.53 20123.92,15126.08 20208.92,15126.08 P22.1
基恩士1: C3.2 C4.2 P2.3 U5.24 | length 2548.1
  Top Layer w10: C3.2 C4.2 18450.56,14208.44 18366,14293 18471,14398 19711,14398 19762,14449 19762,14488 19726,14524 19381,14524 19289.16,14615.84 U5.24
基恩士2: C7.2 C8.2 P6.3 U5.25 | length 2258.8
  Top Layer w10: C7.2 C8.2 18742.05,14219.09 18668.14,14293 18756.14,14381 19716.63,14381 19780,14444.37 19780,14492.63 19732.63,14540 19392.37,14540 19308.84,14623.53 U5.25
基恩士3: C15.2 C16.2 P11.3 U5.26 | length 1978.1
  Top Layer w10: C16.2@19033.54,13863 19033.54,14229.74 18970.29,14293 19041.29,14364 19722.25,14364 19798,14439.75 19798,14498.67 19739.67,14557 19398,14557 19328.53,14626.47 U5.26
基恩士4: C5.2 C6.2 P3.3 U5.27 | length 1687.4
  Top Layer w10: P3.3 P3.3@19277.71,14287.71 ; C6.2 C5.2 19325.04,14240.39 P3.3@19277.71,14287.71 ; U5.27 19348.21,14633.55 19408.76,14573 19746.3,14573 19816,14503.3 19816,14430 19731,14345 19335,14345 P3.3@19277.71,14287.71
基恩士5: C9.2 C10.2 P7.3 U5.29 | length 1403
  Top Layer w10: U5.29 19387.58,14619.79 19418.37,14589 19752.92,14589 19832,14509.92 19832,14419 19740,14327 19621.57,14327 P7.3@19581.07,14286.5 ; P7.3 P7.3@19581.07,14286.5 ; C10.2 C9.2 19641,13970.32 19641,14226.57 P7.3@19581.07,14286.5
基恩士6: C13.2 C14.2 P9.3 U5.30 | length 1253.4
  Top Layer w10: U5.30 19407.27,14622.73 19425,14605 19759.55,14605 19850,14514.55 19850,14306.71 P9.3 ; P9.3@19876.71,14293 19946,14223.71 19946,13983.83 C14.2 C13.2
基恩士7: C18.2 C19.2 P12.3 U5.37 | length 1583.8
  Top Layer w10: U5.37 19586.1,14828.1 19601,14843 v1(19605,14843) ; P12.3@20178.86,14293 20251,14220.86 20251,13994.52 C18.2 C19.2
  Bottom Layer w10: v1(19605,14843) 19634,14872 19899,14872 19942,14829 19942,14672 20178.86,14435.14 P12.3
基恩士8: C25.2 C26.2 P15.3 U5.38 | length 1799.8
  Top Layer w10: U5.38 19574.79,14847.79 v1(19604,14877) ; P15.3@20474,14284 20549,14209 20549,13999.02 C25.2@20486,13936.02 ; C25.2@20484,13934.02 C25.2@20486,13936.02 ; C26.2 C25.2@20486,13936.02 ; C25.2 C25.2@20486,13936.02
  Bottom Layer w10: v1(19604,14877) 19616,14889 19906.04,14889 19958,14837.04 19958,14680.04 20358.04,14280 P15.3
气缸1: R7.1 U5.4 | length 535.4
  Top Layer w10: v1(18945,15225) 18945,15195 18960,15180 18960,15030 19004.42,14985.58 U5.4 ; v1(18945,15355) 18953.98,15363.98 R7.1
  Bottom Layer w10: v1(18945,15225) v1(18945,15355)
气缸2: R7.2 U5.3 | length 493.7
  Top Layer w10: v1(18985,15205) 18980,15200 18980,15040 19014.73,15005.27 U5.3 ; v1(18985,15345) 18985.48,15345.48 R7.2
  Bottom Layer w10: v1(18985,15205) v1(18985,15345)
气缸3: R7.3 U5.2 | length 464.5
  Top Layer w10: v1(19015,15225) 19015,15185 19000,15170 19000,15050 19025.05,15024.95 U5.2 ; v1(19015,15360) 19015,15414.62 R7.3
  Bottom Layer w10: v1(19015,15225) v1(19015,15360)
气缸4: R7.4 U5.59 | length 384.5
  Top Layer w10: R7.4 19048.47,15361.53 19249.79,15160.21 U5.59
气缸5: R8.1 U5.56 | length 484.8
  Top Layer w10: U5.56 19308.84,15218.84 19340,15250 19340,15365 19396.59,15421.59 R8.1
气缸6: R8.2 U5.55 | length 456.1
  Top Layer w10: U5.55 19328.53,15178.53 19440,15290 19440,15350 19455,15365 19540,15365 19570.48,15395.48 R8.2
气缸O1: R7.8 U8.1 | length 917
  Top Layer w10: U8.1 18140,15720 18320,15540 18909.31,15540 R7.8
气缸O2: R7.7 U9.1 | length 672.9
  Top Layer w10: U9.1 18465,15670 18575,15560 18955,15560 18985.48,15529.52 R7.7
气缸O3: R7.6 U13.1 | length 383.5
  Top Layer w10: U13.1 18785,15670 18875,15580 18965,15580 19016.97,15528.03 R7.6
气缸O4: R7.5 U14.1 | length 266.4
  Top Layer w10: R7.5 19048.47,15653.47 U14.1
气缸O5: R8.8 U12.1 | length 334.4
  Top Layer w10: R8.8 19538.98,15548.98 19570,15580 19635,15580 19700,15645 U12.1
气缸O6: R8.7 U15.1 | length 620
  Top Layer w10: R8.7 19570.48,15535.48 19595,15560 19935,15560 20020,15645 U15.1
激光1: R8.3 U5.54 | length 455.1
  Top Layer w10: U5.54 19348.21,15168.21 19445,15265 19520,15265 19601.97,15346.97 R8.3
激光2: R8.4 U5.53 | length 461.3
  Top Layer w10: U5.53 19367.9,15162.9 19450,15245 19525,15245 19635,15355 19635,15420.06 R8.4
激光O1: R8.6 U11.1 | length 713.8
  Top Layer w10: R8.6 19601.97,15531.97 19610,15540 20005,15540 U11.1
激光O2: R8.5 U16.1 | length 863.7
  Top Layer w10: R8.5 19653.14,15520 20185,15520 U16.1
限位1: P30.1 U5.9 | length 1809.5
  Top Layer w10: v1(18910,14865) 18960,14865 18982.16,14887.16 U5.9
  Bottom Layer w10: P30.1@17472,15030 17655,15030 17950,14735 18411.92,14735 18560.92,14884 18891,14884 v1(18910,14865)
限位2: P31.1 U5.8 | length 1545.4
  Top Layer w10: v1(18940,14890) 18945,14890 18961.84,14906.84 U5.8
  Bottom Layer w10: P31.1 17777,14933 17955,14755 18409.29,14755 18554.29,14900 18930,14900 v1(18940,14890)
限位3: P32.1 U5.11 | length 1738.5
  Top Layer w10: v1(18970,14820) 18997.79,14847.79 U5.11
  Bottom Layer w10: P32.1@17472,14720 17532,14660 17795,14660 17835,14700 18425,14700 18575,14850 18855,14850 18888,14817 18967,14817 v1(18970,14820)
限位4: P33.1 U5.10 | length 1389.4
  Top Layer w10: v1(18935,14840) 18938,14843 18970.37,14843 18992.07,14864.69 19077.72,14864.69 U5.10
  Bottom Layer w10: P33.1 17779,14718 18417.54,14718 18567.54,14868 18867,14868 18895,14840 v1(18935,14840)
pads on no net: J1.4 J1.6 P5.5 P5.6 P5.8 U1.5 U2.5 U4.2 U4.3 U4.5 U5.36 U5.45 U5.51 U18.16
copper on no net:
  other v3: 17485,13145 20540,13145 17485,16340 20540,16340

## Polygon pours and split planes (outlines as drawn)
GND on Top Layer "Bottom Layer-No Net" (solid, remove dead copper, pour order 0): 17350,16200 17350,13280 20675,13280 20675,16200
GND on Bottom Layer "Bottom Layer-No Net" (solid, remove dead copper, pour order 2): 20675,16200 20675,13280 17350,13280 17350,16200

## Keep-outs
Keep-Out Layer:
  the board outline again, w10

## Other copper
Top Layer:
  rectangle net 24V: 18000,13528 18205,14222
  rectangle net 24V: 18141,13530 18406,13568
  rectangle net 24V: 18132,13701 18417,13806
  rectangle net NetC21_1: 18285,13290 18410,13515
  rectangle net NetC21_1: 18590,13290 18870,13390
  rectangle net NetC21_1: 18285,13290 18590,13330
  rectangle net NetC21_2: 18580,13405 18635,13515
  rectangle net NetR3_1: 18600,13635 18650,13815
  rectangle net NetR3_1: 18545,13635 18650,13665
  rectangle net 5V: 18670,13595 18865,13740
  rectangle net 5V: 18865,13595 19225,13665
  rectangle net 5V: 19150,13600 19200,13815
  rectangle net 5V: 19150,13775 19285,13815
  rectangle net 5V: 19170,13630 19335,13700
  rectangle net 3V3: 19330,13365 19675,13430
  rectangle net 3V3: 19375,13385 19425,13810
  rectangle net 1: 17945,15795 18200,15865
  rectangle net 24V: 17615,13348 17787,13902
  rectangle net 24V: 17613,13528 18197,13910
  rectangle net 24V: 18143,14287 18197,14399
  rectangle net 24V: 17995,14287 18197,14357
Bottom Layer:
  rectangle net 24V: 17995,13532 18200,14357
  rectangle net 24V: 18093,14123 20538,14228
  rectangle net 24V: 17365,16110 19935,16185
  rectangle net 24V: 19825,16010 19935,16110
  rectangle net 24V: 19500,16010 19605,16115
  rectangle net 24V: 19180,16005 19290,16110
  rectangle net 24V: 18860,16010 18975,16115
  rectangle net 24V: 18545,16010 18650,16115
  rectangle net 24V: 18225,16010 18325,16115
  rectangle net 24V: 17905,16015 18000,16115
  rectangle net 24V: 17590,16015 17675,16120
  rectangle net 24V: 17362,13959 17445,16185
  rectangle net 24V: 17367,13963 18199,14063

## Silkscreen, mask and mechanical layers (free items; w line width, h text height)
Top Overlay:
  text "气缸" at 17420,16015 h80 r90
  text "GND" at 17470,15930 h60
  text "PC15" at 17600,15930 h60
  text "GND" at 18425,15930 h60
  text "PC13" at 18560,15930 h60
  text "GND" at 18745,15930 h60
  text "PB7" at 18890,15930 h60
  text "GND" at 19065,15930 h60
  text "PB7" at 19205,15930 h60
  text "GND" at 19380,15930 h60
  text "PB4" at 19525,15930 h60
  text "GND" at 19700,15930 h60
  text "PB3" at 19845,15930 h60
  text "PD2" at 20030,15930 h60
  text "5V" at 20165,15930 h60
  text "PC12" at 20335,15930 h60
  text "5V" at 20490,15930 h60
  text "GND" at 17780,15925 h60
  text "PC15" at 17925,15925 h60
  text "GND" at 18100,15925 h60
  text "PC14" at 18230,15925 h60
  text "激光1" at 20055,15870 h80
  text "激光2" at 20355,15870 h80
  text "舵机" at 19240,15715 h80
  text "Download" at 20275,15612 h80
  text "CAN1" at 18322,15564 h100 r180
  text "DEBUG" at 19911,15489 h60
  text "BT" at 20172,15487 h60
  text "5V" at 20269,15451 h60 r270
  text "G" at 19401,15429 h60
  text "5V" at 19160,15428 h60
  text "T2C1" at 19243,15427 h60
  text "SDA" at 19118,15376 h60
  text "SCL" at 19243,15376 h60
  text "G" at 19470,15375 h60
  text "3V3" at 19352,15374 h60
  text "G" at 20268,15347 h60 r270
  text "RX" at 20269,15253 h60 r270
  text "限位" at 17550,15236 h80
  text "OLED" at 19260,15220 h60
  text "G" at 18556,15177 h60 r90
  text "G" at 18275,15160 h60 r90
  text "TX" at 20270,15151 h60 r270
  text "G" at 17625,15120 h60 r90
  text "G" at 17910,15120 h60 r90
  text "电调" at 17987,15113 h80 r90
  text "T3C4" at 18556,15019 h60 r90
  text "T5C1" at 18275,15005 h60 r90
  text "PC1" at 17625,14970 h60 r90
  text "PC0" at 17910,14970 h60 r90
  text "G" at 18556,14953 h60 r90
  text "G" at 18275,14935 h60 r90
  text "G" at 17905,14825 h60 r90
  text "G" at 17625,14820 h60 r90
  text "T3C3" at 18556,14781 h60 r90
  text "T5C2" at 18275,14775 h60 r90
  text "PC2" at 17905,14670 h60 r90
  text "PC3" at 17625,14665 h60 r90
  text "CAN2" at 19856,14564 h100
  text "3V3" at 18835,14535 h60
  text "G" at 18950,14535 h60
  text "SCK" at 19020,14535 h60
  text "SI" at 19150,14535 h60
  text "NC" at 19230,14535 h60
  text "NC" at 19330,14535 h60
  text "SO" at 19435,14535 h60
  text "NC" at 19540,14535 h60
  text "NSS" at 19625,14535 h60
  text "T9C1" at 17630,14476 h60 r90
  text "9250" at 19740,14460 h80
  text "T9C2" at 17628,14334 h60 r90
  text "PC4" at 18500,14261 h60 r90
  text "PC5" at 18811,14259 h60 r90
  text "PB0" at 19110,14259 h60 r90
  text "PB1" at 19408,14259 h60 r90
  text "PB10" at 19709,14259 h60 r90
  text "PB11" at 20020.5,14259 h60 r90
  text "PC6" at 20312,14259 h60 r90
  text "PC7" at 20611.5,14259 h60 r90
  text "5V" at 17627.64,14252 h60 r90
  text "拨弹" at 17932,14234 h80 r90
  text "24V" at 18498.83,14134 h60 r90
  text "24V" at 18810.5,14134 h60 r90
  text "24V" at 19110,14134 h60 r90
  text "24V" at 19408,14134 h60 r90
  text "24V" at 19709,14134 h60 r90
  text "24V" at 20020.5,14134 h60 r90
  text "24V" at 20311.5,14134 h60 r90
  text "24V" at 20611,14134 h60 r90
  text "GND" at 17629,14102 h60 r90
  text "编码器" at 17393,14052 h60
  text "G" at 18499.33,14041 h60 r90
  text "G" at 18811,14041 h60 r90
  text "G" at 19110.5,14041 h60 r90
  text "G" at 19408.5,14041 h60 r90
  text "G" at 19709.5,14041 h60 r90
  text "G" at 20021,14041 h60 r90
  text "G" at 20312,14041 h60 r90
  text "G" at 20611.5,14041 h60 r90
  text "3K3" at 18734,13771 h60
  text "BLUE" at 19664,13767 h60
  text "RED" at 18933,13760 h60
  text "10K" at 18736,13696 h60
  text "Green" at 20606,13653 h60 r90
  text "PB14" at 19977,13381 h60
Top Solder:
  text "@Shawn" at 19561,13638 h100

## Dimensions
17350,16425 to 20675,16425 on Top Overlay
17575,16475 to 17400,13025 on Top Overlay
17485,16340 to 20540,16340 on Top Overlay
17485,16340 to 17485,13145 on Top Overlay

## Text inside footprints (layer, text, board x,y; h text height)
U7: Top Overlay "9032" at 20145,13455 h86.61; Top Overlay "-" at 20135,13565 h86.61; Top Overlay "+" at 20275,13555 h86.61